# EAGLE board Schematic_v3 (EAGLE 9.6.2)
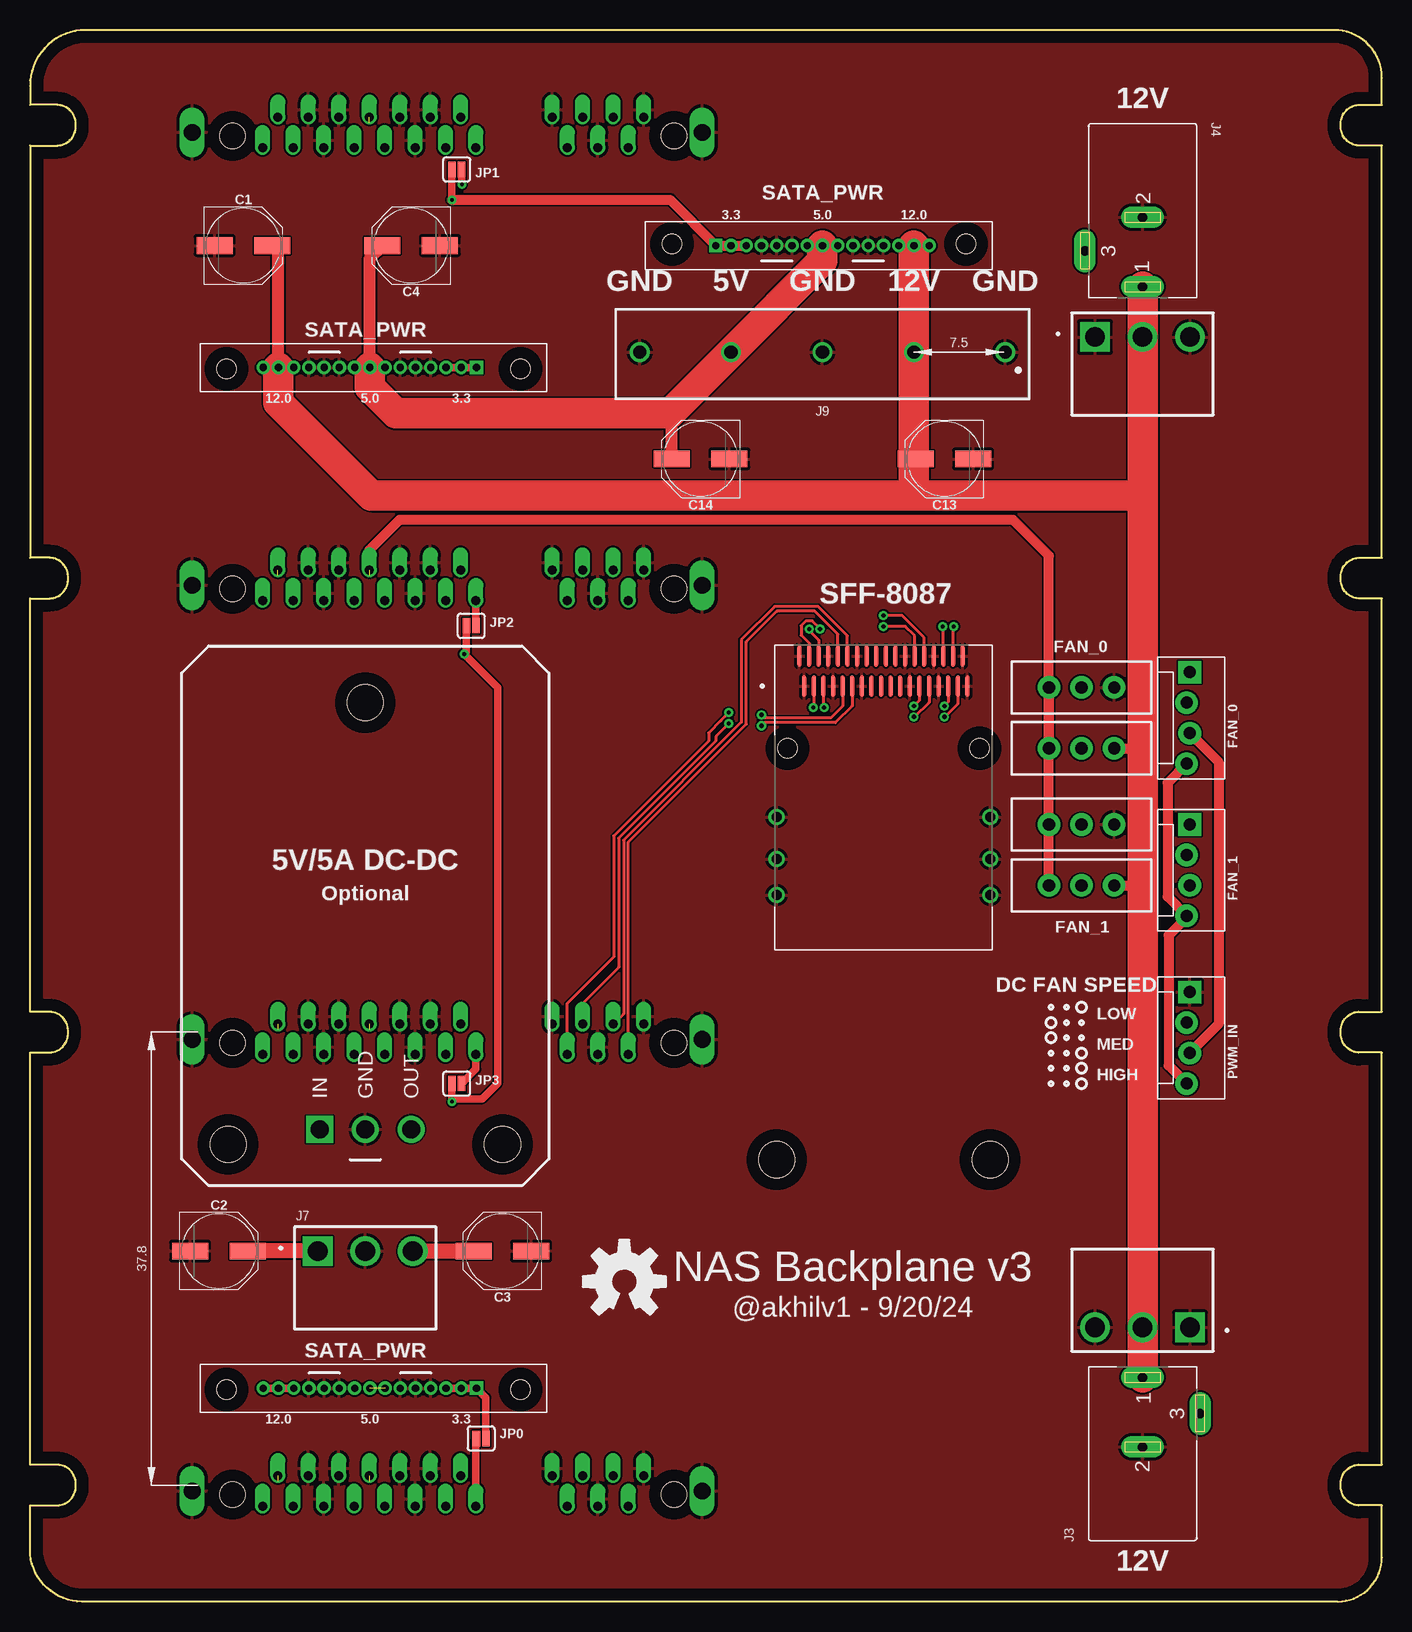
[diagram p0: board, top side]
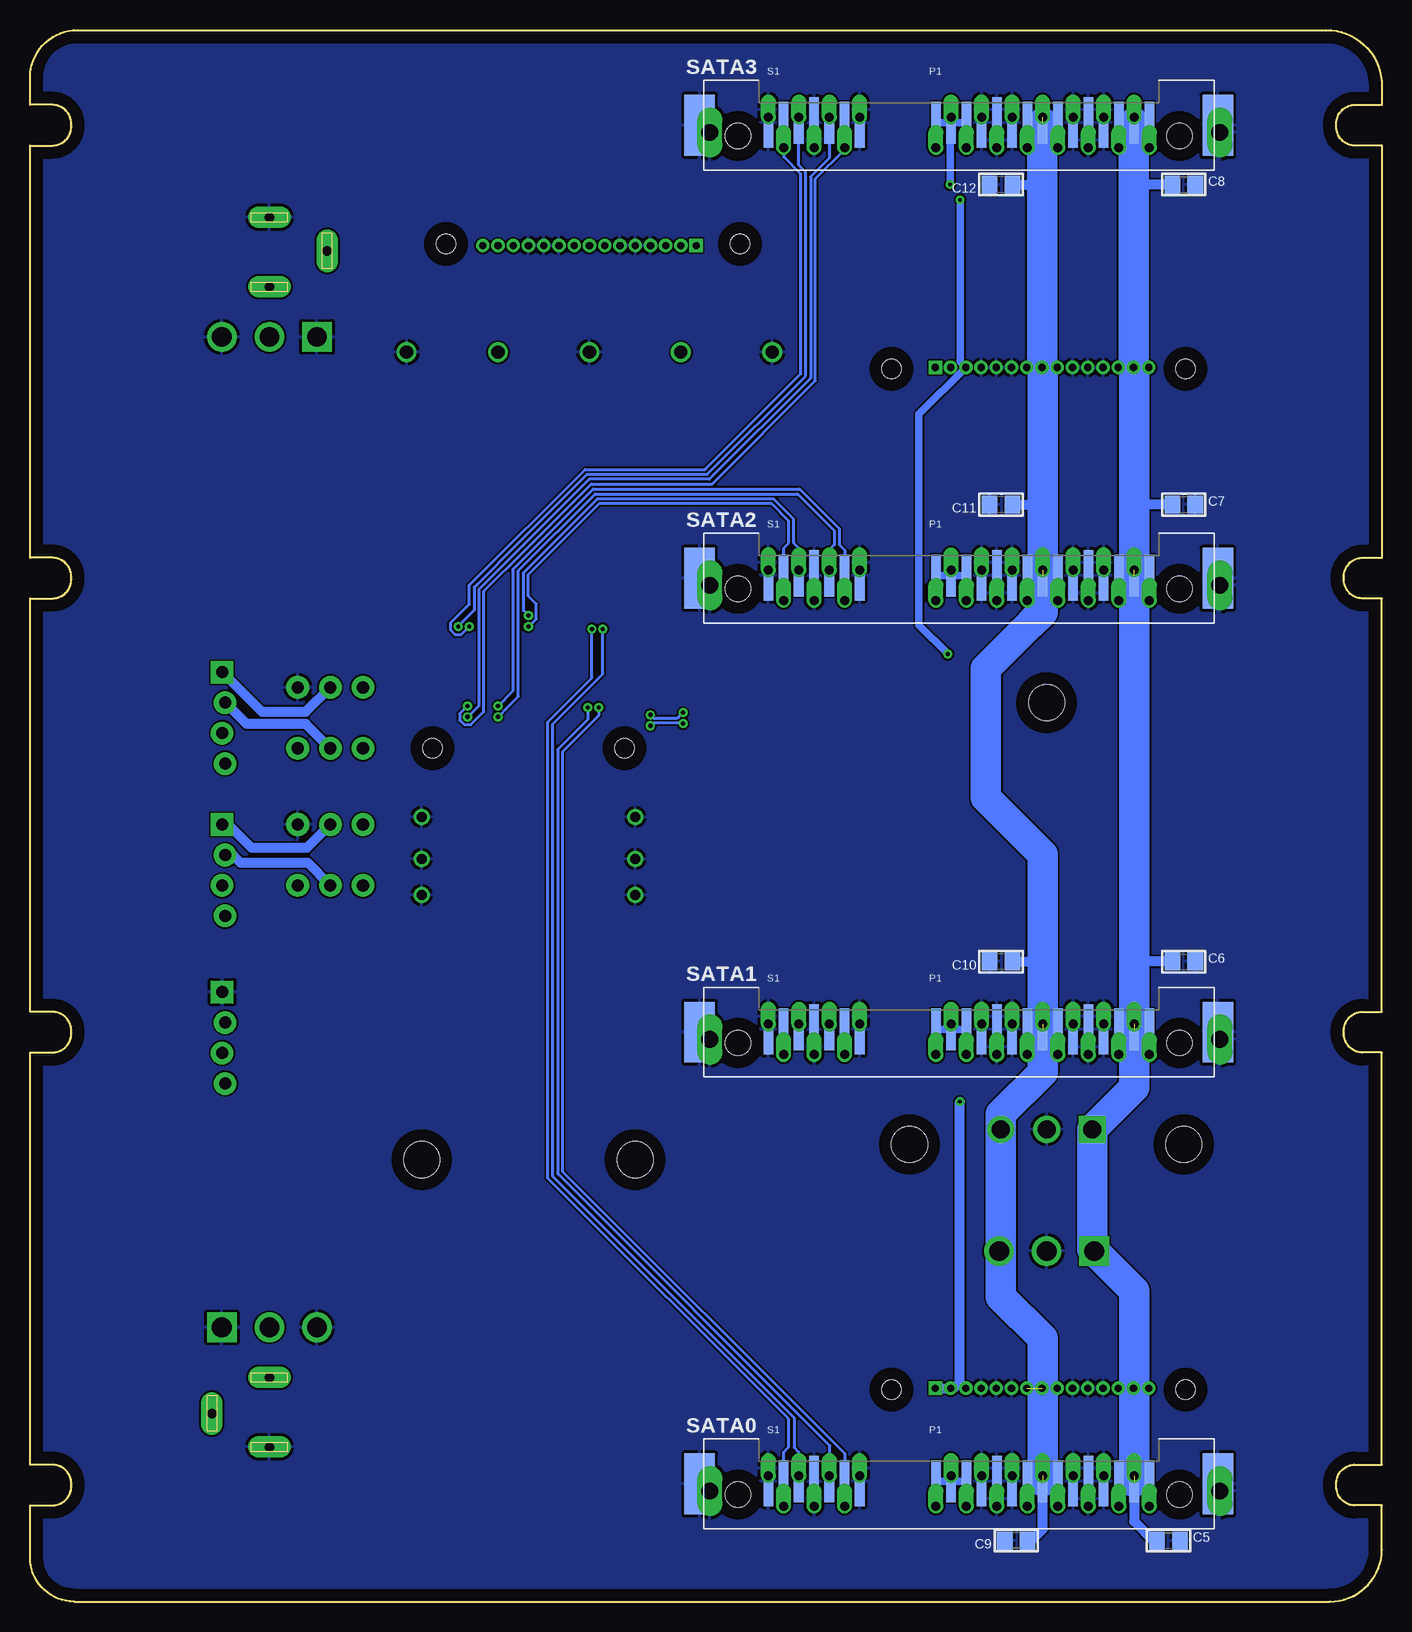
[diagram p1: board, bottom side, seen from below]

Size 112.66 x 131 mm. Coordinates in mm from the lower left corner, seen from the top.
Outline: 108.98,0 4.34,0 arc-90 0,4.34 0,8.01 2.31,8.01 arc90 3.81,9.71 arc90 2.31,11.41 0,11.41 0,45.76 1.68,45.76 arc90 3.17,47.46 arc90 1.68,49.16 0,49.16 0,83.61 1.68,83.61 arc90 3.17,85.31 arc90 1.68,87.01 0,87.01 0,121.36 2.31,121.36 arc90 3.81,123.06 arc90 2.31,124.76 0,124.76 0,126.34 arc-90 4.66,131 108.68,131 arc-90 112.66,127.02 112.66,124.76 110.72,124.76 arc90 109.22,123.06 arc90 110.72,121.36 112.66,121.36 112.66,87.01 110.72,87.01 arc90 109.22,85.31 arc90 110.72,83.61 112.66,83.61 112.66,49.16 110.72,49.16 arc90 109.22,47.46 arc90 110.72,45.76 112.66,45.76 112.66,11.41 110.72,11.41 arc90 109.22,9.71 arc90 110.72,8.01 112.66,8.01 112.66,3.68 arc-90 108.98,0
Copper layers (1*16): Top 0.035mm / dielectric 1.5mm / Bottom 0.035mm
Design rules "default *": minimum track width 6mil, minimum drill 0.3mm, track to track 6mil, track to pad 6mil, pad to pad 6mil, via to via 6mil, smd to smd 6mil, copper to edge 40mil, drill to drill 6mil, minimum pad ring 10mil, minimum via ring 8mil, stop-mask expansion 4mil, vias tented up to drill 0.35mm, thermal gap 10mil
Holes 3 mm at 62.23,36.83 80.01,36.83

## Footprints (pad centres in the part's own frame; a part is rotated, then mirrored left to right if it is on the bottom)
PANASONIC_D = smd 3 x 1.4: + 2.4,0; - -2.4,0
C0805 = smd 1.3 x 1.5: 1 -0.95,0; 2 0.95,0
MOLEX-1X4_LOCK = drill 1.016 pad 1.88 square: 1 0,0.127 | drill 1.016 pad 1.88: 2 2.54,-0.127; 3 5.08,0.127; 4 7.62,-0.127
PTH_90 = drill 0.6 pad 1.016 square: P$1 0,0 | drill 0.6 pad 1.016: P$2 1.27,0; P$3 2.54,0; P$5 5.08,0; P$7 7.62,0; P$8 8.89,0; P$9 10.16,0; P$11 12.7,0; P$13 15.24,0; P$14 16.51,0; P$15 17.78,0 | drill 0.6 pad 0.889: P$4 3.81,0; P$6 6.35,0; P$10 11.43,0; P$12 13.97,0 | hole 1.6: 20.84,0.13; -3.66,0.13
694106301002 = drill 0.8 pad 1.8 long: 1 13.6,0; 2 7.8,0; 3 10.6,-4.8
HDR-03 = drill 1.65 square: 1 -3.96,0 | drill 1.65: 2 0,0; 3 3.96,0
691243410005 = drill 1.1: 1 -15.24,0; 2 -7.62,0; 3 0,0; 4 7.62,0; 5 15.24,0
SMT-JUMPER_2_NC_PASTE_SILK = smd 0.635 x 1.27: 1 -0.406,0; 2 0.406,0
SWITCH_SPDT_PTH_11.6X4.0MM_LOCK = drill 1.016 pad 1.88: 1 0,2.718; 2 0,0; 3 0,-2.718
TE_2023246-2 = smd 0.8 x 3.5: P1 -1.905,0.23; P2 -0.635,0.23; P3 0.635,0.23; P7 5.715,0.23; P8 6.985,0.23; P9 8.255,0.23; P13 13.335,0.23; P14 14.605,0.23; P15 15.875,0.23; S2 -14.605,0.23; S3 -13.335,0.23; S5 -10.795,0.23; S6 -9.525,0.23 | smd 0.8 x 4.2: P4 1.905,0.23; P5 3.175,0.23; P6 4.445,0.23; P10 9.525,0.23; P11 10.795,0.23; P12 12.065,0.23; S1 -15.875,0.23; S4 -12.065,0.23; S7 -8.255,0.23 | smd 2.54 x 5.08: P$1 -21.59,0; P$2 21.59,0 | drill 0.75 pad 1.016 offset: THT1 -15.875,0.67; THT2 -14.605,-1.87; THT3 -13.335,0.67; THT4 -12.065,-1.87; THT5 -10.795,0.67; THT6 -9.525,-1.87; THT7 -8.255,0.67; THT8 -1.905,-1.87; THT9 -0.635,0.67; THT10 0.635,-1.87; THT11 1.905,0.67; THT12 3.175,-1.87; THT13 4.445,0.67; THT14 5.715,-1.87; THT15 6.985,0.67; THT16 8.255,-1.87; THT17 9.525,0.67; THT18 10.795,-1.87; THT19 12.065,0.67; THT20 13.335,-1.87; THT21 14.605,0.67; THT22 15.875,-1.87 | drill 1.4 pad 2 long: THT$1 -20.75,-0.6; THT$2 21.75,-0.6 | hole 2.1: 18.4,-0.9; -18.4,-0.9
TE_1888019-4 = smd 0.35 x 1.8: A1 -6.6,5.18; A2 -5.8,5.18; A3 -5,5.18; A4 -4.2,5.18; A5 -3.4,5.18; A6 -2.6,5.18; A7 -1.8,5.18; A8 -1,5.18; A9 -0.2,5.18; A10 0.6,5.18; A11 1.4,5.18; A12 2.2,5.18; A13 3,5.18; A14 3.8,5.18; A15 4.6,5.18; A16 5.4,5.18; A17 6.2,5.18; A18 7,5.18; B1 -7,7.69; B2 -6.2,7.69; B3 -5.4,7.69; B4 -4.6,7.69; B5 -3.8,7.69; B6 -3,7.69; B7 -2.2,7.69; B8 -1.4,7.69; B9 -0.6,7.69; B10 0.2,7.69; B11 1,7.69; B12 1.8,7.69; B13 2.6,7.69; B14 3.4,7.69; B15 4.2,7.69; B16 5,7.69; B17 5.8,7.69; B18 6.6,7.69 | drill 0.85: S1 -8.9,-5.72; S2 8.9,-5.72; S3 -8.9,-9.22; S4 8.9,-9.22; S5 -8.9,-12.22; S6 8.9,-12.22 | hole 1.59: -8,0; 8,0
5V_15W_DC_DC = drill 1.5 square: P$1 -3.81,-17.78 | drill 1.5: P$2 0,-17.78; P$3 3.81,-17.78 | hole 3: 0,17.78; -11.43,-19.05; 11.43,-19.05

## Placement (x,y rotation side)
C1  100uF  [PANASONIC_D]  17.78,113.03 0 top
C2  100uF  [PANASONIC_D]  15.75,29.21 0 top
C3  100uF  [PANASONIC_D]  39.37,29.21 180 top
C4  100uF  [PANASONIC_D]  31.75,113.03 180 top
C5  [C0805]  17.78,5.08 0 bottom
C6  [C0805]  16.51,53.34 0 bottom
C7  [C0805]  16.51,91.44 0 bottom
C8  [C0805]  16.51,118.11 0 bottom
C9  [C0805]  30.48,5.08 180 bottom
C10  [C0805]  31.75,53.34 180 bottom
C11  [C0805]  31.75,91.44 180 bottom
C12  [C0805]  31.75,118.11 180 bottom
C13  100uF  [PANASONIC_D]  76.2,95.25 180 top
C14  100uF  [PANASONIC_D]  55.88,95.25 180 top
FAN_0  [MOLEX-1X4_LOCK]  96.52,77.47 270 top
FAN_1  [MOLEX-1X4_LOCK]  96.52,64.77 270 top
J1  SATAPWR  [PTH_90]  37.21,102.87 180 top
J2  SATAPWR  [PTH_90]  37.21,17.78 180 top
J3  694106301002  [694106301002]  92.71,5.08 90 top
J4  694106301002  [694106301002]  92.71,123.19 270 top
J5  B3P-VH(LF)(SN)  [HDR-03]  92.71,22.86 180 top
J6  B3P-VH(LF)(SN)  [HDR-03]  92.71,105.41 0 top
J7  B3P-VH(LF)(SN)  [HDR-03]  27.94,29.21 0 top
J8  SATAPWR  [PTH_90]  57.15,113.03 0 top
J9  [691243410005]  66.04,104.14 180 top
JP0  JUMPER-SMT_2_NC_PASTE_SILK  [SMT-JUMPER_2_NC_PASTE_SILK]  37.59,13.59 180 top
JP1  JUMPER-SMT_2_NC_PASTE_SILK  [SMT-JUMPER_2_NC_PASTE_SILK]  35.56,119.38 0 top
JP2  JUMPER-SMT_2_NC_PASTE_SILK  [SMT-JUMPER_2_NC_PASTE_SILK]  36.77,81.34 0 top
JP3  JUMPER-SMT_2_NC_PASTE_SILK  [SMT-JUMPER_2_NC_PASTE_SILK]  35.56,43.18 0 top
LOGO1  OSHW-LOGOL  [OSHW-LOGO-L]  49.53,26.67 0 top
PWM_IN  [MOLEX-1X4_LOCK]  96.52,50.8 270 top
S1  [SWITCH_SPDT_PTH_11.6X4.0MM_LOCK]  87.63,71.12 270 top
S2  [SWITCH_SPDT_PTH_11.6X4.0MM_LOCK]  87.63,76.2 90 top
S3  [SWITCH_SPDT_PTH_11.6X4.0MM_LOCK]  87.63,59.69 270 top
S4  [SWITCH_SPDT_PTH_11.6X4.0MM_LOCK]  87.63,64.77 90 top
SATA0  1735284-3  [TE_2023246-2]  35.26,9.81 0 bottom
SATA1  1735284-3  [TE_2023246-2]  35.26,47.46 0 bottom
SATA2  1735284-3  [TE_2023246-2]  35.26,85.31 0 bottom
SATA3  1735284-3  [TE_2023246-2]  35.26,123.06 0 bottom
SFF-8087  1888019-4  [TE_1888019-4]  71.12,71.12 0 top
U$1  5V_DC_DC  [5V_15W_DC_DC]  27.94,57.15 0 top

## Library data of the parts
C1-C4 C13 C14 = SparkFun-Capacitors; PROD_ID: CAP-12547
C5-C12 = LU r11.5
FAN_0 FAN_1 PWM_IN = SparkFun-Connectors; PROD_ID: CONN-08186; SF_ID: PRT-08231
J1 J2 J8 = SATA_Power
J3 J4 = DC Power Jacks; CREATED_BY: PCBLayout.com; DIGIKEY_PART_NUMBER: 732-5930-ND; MANUFACTURER: Wurth Electronics Inc.; MPN: 694106301002
J5-J7 = Connectors; CREATED_BY: PCBLayout.com; DIGIKEY_PART_NUMBER: 455-1640-ND; MANUFACTURER: JST Sales America Inc.; MPN: B3P-VH(LF)(SN)
J9 = Wurth_Connectors_WR-TBL Rising Cage Clamp; IR-UL: 10A; IR-VDE: 10A; PART-NUMBER: 691243410005; PINS: 5; PITCH: 7.62mm; TYPE: Horizontal; WIRE: 12 to 30 (AWG) 3.31 to 0.0509 (mm²); WORKING-VOLTAGE-UL: 300V (AC); WORKING-VOLTAGE-VDE: 450V (AC)
JP0 JP1-JP3 = SparkFun-Jumpers
LOGO1 = SparkFun-Aesthetics
S1-S4 = SparkFun-Switches; PROD_ID: SWCH-08261; SF_SKU: COM-00102
SATA0 SATA1-SATA3 = 2023246-2; AVAILABILITY: In Stock; COMMENT: 2023246-2; DESCRIPTION: Conn SATA RCP 22 POS 1.27mm Solder RA SMD 22 Terminal 1 Port Tray; MF: TE Connectivity; MP: 2023246-2; PACKAGE: None; PRICE: None; PURCHASE-URL: https://pricing.snapeda.com/search/part/2023246-2/?ref=eda
SFF-8087 = 1888019-4; AVAILABILITY: Unavailable; COMMENT: 1888019-4; DESCRIPTION: Receptacle; Shielded; EVERCLEAR Mini-SAS; Internal; RA Combo; 36 Pos.; Dual Key; MF: TE Connectivity; MP: 1888019-4; PACKAGE: None; PRICE: None; TE_PURCHASE_URL: https://www.te.com/usa-en/product-1888019-4.html?te_bu=Cor&te_type=disp&te_campaign=seda_glo_cor-seda-global-disp-prtnr-fy19-seda-model-bom-cta_sma-317_1&elqCampaignId=32493
U$1 = SATA_Power_(v2~recovered)

## Nets
3.3V: J1.P$1 J1.P$2 J1.P$3 J2.P$1 J2.P$2 J2.P$3 J8.P$1 J8.P$2 J8.P$3 JP0.1 JP1.1 JP2.1 JP3.1
5V: C3.+ C4.+ C9.1 C10.1 C11.1 C12.1 C14.+ J1.P$7 J1.P$8 J1.P$9 J2.P$7 J2.P$8 J2.P$9 J7.3 J8.P$7 J8.P$8 J8.P$9 J9.4 S1.3 S2.1 S3.3 S4.1 SATA0.P7 SATA0.P8 SATA0.P9 SATA0.THT14 SATA0.THT15 SATA0.THT16 SATA1.P7 SATA1.P8 SATA1.P9 SATA1.THT14 SATA1.THT15 SATA1.THT16 SATA2.P7 SATA2.P8 SATA2.P9 SATA2.THT14 SATA2.THT15 SATA2.THT16 SATA3.P7 SATA3.P8 SATA3.P9 SATA3.THT14 SATA3.THT15 SATA3.THT16 U$1.P$3
12V: C1.+ C2.+ C5.1 C6.1 C7.1 C8.1 C13.+ J1.P$13 J1.P$14 J1.P$15 J2.P$13 J2.P$14 J2.P$15 J3.1 J4.1 J5.2 J6.2 J7.1 J8.P$13 J8.P$14 J8.P$15 J9.2 S1.1 S3.1 SATA0.P13 SATA0.P14 SATA0.P15 SATA0.THT20 SATA0.THT21 SATA0.THT22 SATA1.P13 SATA1.P14 SATA1.P15 SATA1.THT20 SATA1.THT21 SATA1.THT22 SATA2.P13 SATA2.P14 SATA2.P15 SATA2.THT20 SATA2.THT21 SATA2.THT22 SATA3.P13 SATA3.P14 SATA3.P15 SATA3.THT20 SATA3.THT21 SATA3.THT22 U$1.P$1
FAN0_HI: FAN_0.2 S1.2
FAN0_LO: FAN_0.1 S2.2
FAN1_HI: FAN_1.2 S3.2
FAN1_LO: FAN_1.1 S4.2
FAN_PWM: FAN_0.4 FAN_1.4 PWM_IN.4
FAN_TACH: FAN_0.3 PWM_IN.3
GND: C1.- C2.- C3.- C4.- C5.2 C6.2 C7.2 C8.2 C9.2 C10.2 C11.2 C12.2 C13.- C14.- J1.P$4 J1.P$5 J1.P$6 J1.P$10 J1.P$11 J1.P$12 J2.P$4 J2.P$5 J2.P$6 J2.P$10 J2.P$11 J2.P$12 J3.2 J4.2 J5.1 J5.3 J6.1 J6.3 J7.2 J8.P$4 J8.P$5 J8.P$6 J8.P$10 J8.P$11 J8.P$12 J9.1 J9.3 J9.5 PWM_IN.1 S2.3 S4.3 SATA0.P4 SATA0.P5 SATA0.P6 SATA0.P10 SATA0.P11 SATA0.P12 SATA0.P$1 SATA0.P$2 SATA0.S1 SATA0.S4 SATA0.S7 SATA0.THT1 SATA0.THT4 SATA0.THT7 SATA0.THT11 SATA0.THT12 SATA0.THT13 SATA0.THT17 SATA0.THT18 SATA0.THT19 SATA0.THT$1 SATA0.THT$2 SATA1.P4 SATA1.P5 SATA1.P6 SATA1.P10 SATA1.P11 SATA1.P12 SATA1.P$1 SATA1.P$2 SATA1.S1 SATA1.S4 SATA1.S7 SATA1.THT1 SATA1.THT4 SATA1.THT7 SATA1.THT11 SATA1.THT12 SATA1.THT13 SATA1.THT17 SATA1.THT18 SATA1.THT19 SATA1.THT$1 SATA1.THT$2 SATA2.P4 SATA2.P5 SATA2.P6 SATA2.P10 SATA2.P11 SATA2.P12 SATA2.P$1 SATA2.P$2 SATA2.S1 SATA2.S4 SATA2.S7 SATA2.THT1 SATA2.THT4 SATA2.THT7 SATA2.THT11 SATA2.THT12 SATA2.THT13 SATA2.THT17 SATA2.THT18 SATA2.THT19 SATA2.THT$1 SATA2.THT$2 SATA3.P4 SATA3.P5 SATA3.P6 SATA3.P10 SATA3.P11 SATA3.P12 SATA3.P$1 SATA3.P$2 SATA3.S1 SATA3.S4 SATA3.S7 SATA3.THT1 SATA3.THT4 SATA3.THT7 SATA3.THT11 SATA3.THT12 SATA3.THT13 SATA3.THT17 SATA3.THT18 SATA3.THT19 SATA3.THT$1 SATA3.THT$2 SFF-8087.A1 SFF-8087.A4 SFF-8087.A7 SFF-8087.A12 SFF-8087.A15 SFF-8087.A18 SFF-8087.B1 SFF-8087.B4 SFF-8087.B7 SFF-8087.B12 SFF-8087.B15 SFF-8087.B18 SFF-8087.S1 SFF-8087.S2 SFF-8087.S3 SFF-8087.S4 SFF-8087.S5 SFF-8087.S6 U$1.P$2
N$1: JP1.2 SATA3.P1 SATA3.P2 SATA3.P3 SATA3.THT8 SATA3.THT9 SATA3.THT10
N$2: JP2.2 SATA2.P1 SATA2.P2 SATA2.P3 SATA2.THT8 SATA2.THT9 SATA2.THT10
N$3: JP3.2 SATA1.P1 SATA1.P2 SATA1.P3 SATA1.THT8 SATA1.THT9 SATA1.THT10
N$4: JP0.2 SATA0.P1 SATA0.P2 SATA0.P3 SATA0.THT8 SATA0.THT9 SATA0.THT10
RX0_N [RX0]: SATA0.S5 SATA0.THT5 SFF-8087.A3
RX0_P [RX0]: SATA0.S6 SATA0.THT6 SFF-8087.A2
RX1_N [RX1]: SATA1.S5 SATA1.THT5 SFF-8087.A6
RX1_P [RX1]: SATA1.S6 SATA1.THT6 SFF-8087.A5
RX2_N [RX2]: SATA2.S5 SATA2.THT5 SFF-8087.A14
RX2_P [RX2]: SATA2.S6 SATA2.THT6 SFF-8087.A13
RX3_N [RX3]: SATA3.S5 SATA3.THT5 SFF-8087.A17
RX3_P [RX3]: SATA3.S6 SATA3.THT6 SFF-8087.A16
TX0_N [TX0]: SATA0.S3 SATA0.THT3 SFF-8087.B3
TX0_P [TX0]: SATA0.S2 SATA0.THT2 SFF-8087.B2
TX1_N [TX1]: SATA1.S3 SATA1.THT3 SFF-8087.B6
TX1_P [TX1]: SATA1.S2 SATA1.THT2 SFF-8087.B5
TX2_N [TX2]: SATA2.S3 SATA2.THT3 SFF-8087.B14
TX2_P [TX2]: SATA2.S2 SATA2.THT2 SFF-8087.B13
TX3_N [TX3]: SATA3.S3 SATA3.THT3 SFF-8087.B17
TX3_P [TX3]: SATA3.S2 SATA3.THT2 SFF-8087.B16

## Tracks (layer width: path | path; a pad name or v marks a point on that pad's centre or on a via)
3.3V  (via drill 0.3, 0.35)
  Top 0.61: J1.P$1 J1.P$2 J1.P$3 | JP2.1 36.36,79.16 v36.18,78.98 38.96,76.2 38.96,43.18 37.69,41.91 35.43,41.91 v35.18,41.66 35.15,41.68 JP3.1 | JP1.1 v35.15,116.84 | JP0.1 38,16.99 J2.P$1 J2.P$2 J2.P$3
  Top 0.813: J8.P$3 J8.P$2 J8.P$1 53.34,116.84 v35.15,116.84
  Bottom 0.61: v35.15,116.84 35.15,103.35 J1.P$3 38.58,98.96 38.58,81.41 36.18,79.01 v36.18,78.98
  Bottom 0.813: J2.P$3 35.18,18.29 | 35.18,18.29 v35.18,41.66 | 35.18,18.29 35.69,17.78 J2.P$2 J2.P$1
5V  (5 unrouted)
  Top 0.61: J1.P$9 J1.P$8 J1.P$7
  Top 0.813: S3.3 S4.1 S2.1 S1.3 84.91,87.17 81.92,90.17 30.8,90.17 28.27,87.65 SATA2.THT15 | J8.P$7 J8.P$8 J8.P$9
  Top 1.016: J1.P$8 28.32,112 C4.+ | C14.+ 53.48,98.92 53.34,99.06
  Top 1.27: J7.3 C3.+
  Top 2.54: J1.P$8 28.32,101.22 30.48,99.06 53.34,99.06 J9.4 66.04,111.76 J8.P$8
  Bottom 0.254: SATA0.THT16 SATA0.P9 | SATA0.THT14 SATA0.P7 | SATA2.THT16 SATA2.P9 | SATA2.THT14 SATA2.P7 | SATA3.P7 SATA3.THT14 | SATA3.P9 SATA3.THT16 | SATA1.THT14 SATA1.P7 | SATA1.THT16 SATA1.P9
  Bottom 0.61: SATA0.P9 SATA0.P8 SATA0.P7 | SATA1.P9 SATA1.P8 SATA1.P7 | SATA2.P9 SATA2.P8 SATA2.P7 | SATA3.P9 SATA3.P8 | SATA3.P7 29.5,123.24 28.32,123.24 | 28.27,17.78 J2.P$8
  Bottom 0.813: C12.1 28.32,118.11 | C11.1 28.27,91.44 27.94,91.44 | C10.1 28.27,53.34 | C9.1 29.21,5.08 28.27,6.01 SATA0.P8 | 30.62,81.42 29.35,81.42 | J2.P$9 J2.P$7
  Bottom 2.54: SATA3.P8 28.32,123.24 28.32,118.11 J1.P$8 28.27,102.82 28.27,91.44 SATA2.P8 28.27,82.49 29.35,81.42 33,77.77 33,67.01 28.27,62.29 28.27,53.34 SATA1.P8 28.27,44.12 31.75,40.64 U$1.P$3 31.75,29.36 J7.3 31.75,29.06 31.75,25.4 28.27,21.93 28.27,17.78 SATA0.P8
12V  (3 unrouted)
  Top 0.61: J1.P$15 J1.P$14 J1.P$13 | J2.P$15 J2.P$14 J2.P$13
  Top 0.813: C13.+ 73.66,95.25 | S1.1 92.71,71.12 | S3.1 92.71,59.69 | J8.P$13 J8.P$14 J8.P$15
  Top 1.016: J1.P$14 20.7,112.51 C1.+
  Top 1.27: J7.1 C2.+
  Top 2.54: 92.71,92.2 J6.2 J4.1 | 92.71,92.2 92.71,71.12 92.71,59.69 J3.1 J5.2 | J1.P$14 20.7,99.95 28.45,92.2 73.66,92.2 | 73.66,92.2 92.71,92.2 | 73.66,92.2 73.66,95.25 J9.2 J8.P$14
  Bottom 0.254: SATA0.THT22 SATA0.P15 | SATA0.THT20 SATA0.P13 | SATA2.THT22 SATA2.P15 | SATA2.THT20 SATA2.P13 | SATA3.P14 SATA3.THT21 | SATA3.P13 SATA3.THT20 | SATA3.P15 SATA3.THT22 | SATA2.P14 20.66,83.82 | SATA1.THT20 SATA1.P13 | SATA1.THT22 SATA1.P15
  Bottom 0.61: SATA0.P15 SATA0.P14 | SATA0.P13 20.75,10.04 20.7,9.99 | SATA1.P15 SATA1.P14 SATA1.P13 | SATA2.P15 SATA2.P14 SATA2.P13 | SATA3.P15 SATA3.P14 SATA3.P13 | 20.66,17.78 J2.P$14
  Bottom 0.813: C8.1 20.7,118.11 | C7.1 20.66,91.44 | C6.1 20.66,53.34 | SATA0.P14 20.66,6.68 19.05,5.08 C5.1 | J2.P$15 J2.P$13
  Bottom 2.54: 20.66,83.82 20.66,53.34 SATA1.P14 20.66,42.84 U$1.P$1 24.13,29.36 J7.1 20.66,25.89 20.66,17.78 SATA0.P14 20.7,9.99 | SATA2.P14 20.66,91.44 20.66,102.82 J1.P$14 20.7,118.11 20.7,123.24 SATA3.P14
FAN0_HI
  Bottom 0.813: S1.2 89.66,73.15 94.61,73.15 FAN_0.2
FAN0_LO
  Bottom 0.813: FAN_0.1 93.34,74.17 89.66,74.17 S2.2
FAN1_HI
  Bottom 0.813: S3.2 89.53,61.59 95.12,61.59 95.76,62.23 FAN_1.2
FAN1_LO
  Bottom 0.813: S4.2 89.59,62.81 94.18,62.81 96.14,64.77 FAN_1.1
FAN_PWM
  Top 0.813: FAN_0.4 94.79,68.25 94.79,58.75 FAN_1.4 96.39,57.02 94.89,55.52 94.89,44.68 PWM_IN.4
FAN_TACH
  Top 0.813: FAN_0.3 99.06,69.98 99.06,48.13 PWM_IN.3
GND
  Bottom 0.254: SATA0.THT18 SATA0.P11 | SATA0.THT12 SATA0.P5 | SATA2.S1 SATA2.THT1 | SATA2.S4 SATA2.THT4 | SATA2.S7 SATA2.THT7 | SATA2.P$1 56.25,84.71 SATA2.THT$1 | SATA2.P5 SATA2.THT12 | SATA2.P6 SATA2.THT13 | SATA2.P4 SATA2.THT11 | SATA2.P12 SATA2.THT19 | SATA2.P11 SATA2.THT18 | SATA2.P10 SATA2.THT17 | SATA3.THT4 SATA3.S4 | SATA3.S1 SATA3.THT1 | SATA3.S7 SATA3.THT7 | SATA0.S4 SATA0.THT4 | SATA0.S1 SATA0.THT1 | SATA0.S7 SATA0.THT7 | SATA1.S7 SATA1.THT7 | SATA1.S4 SATA1.THT4 | SATA1.S1 SATA1.THT1 | SATA1.P$1 56.38,46.99 55.88,46.99 SATA1.THT$1 | SATA0.P$1 56.25,9.21 SATA0.THT$1
  pour Bottom: -6.35,139.7 128.27,139.7 128.27,-16.51 -6.35,-16.51
  pour Top: -5.08,138.43 129.54,138.43 129.54,-17.78 -5.08,-17.78
N$1  (via drill 0.3)
  Top 0.61: v35.99,118.11 35.97,118.13 JP1.2
  Bottom 0.305: SATA3.P3 SATA3.THT10 | SATA3.P1 SATA3.THT8 | SATA3.P2 SATA3.THT9
  Bottom 0.61: SATA3.P3 SATA3.P2 | SATA3.P2 SATA3.P1 | SATA3.P2 35.99,123.2 v35.99,118.11
N$2
  Top 0.61: JP2.2 SATA2.THT8
  Bottom 0.254: SATA2.THT8 SATA2.P1 | SATA2.P2 SATA2.THT9 | SATA2.P3 SATA2.THT10
  Bottom 0.61: SATA2.P3 SATA2.P2 SATA2.P1
N$3
  Top 0.61: JP3.2 37.16,44.38 SATA1.THT8
  Bottom 0.254: SATA1.P2 SATA1.THT9 | SATA1.P1 SATA1.THT8 | SATA1.P3 SATA1.THT10
  Bottom 0.61: SATA1.P3 SATA1.P2 SATA1.P1
N$4
  Top 0.61: SATA0.THT8 37.16,13.57 JP0.2
  Bottom 0.254: SATA0.THT10 SATA0.P3 | SATA0.THT8 SATA0.P1 | SATA0.P2 SATA0.THT9
  Bottom 0.61: SATA0.P3 SATA0.P2 SATA0.P1
RX0_N  (via drill 0.35)
  Top 0.254: SFF-8087.A3 66.12,74.58 v66.17,74.52
  Bottom 0.254: v66.17,74.52 66.17,73.53 68.7,71 68.7,35.68 46.01,12.99 46.01,10.08 SATA0.S5 SATA0.THT5
RX0_P  (via drill 0.35)
  Top 0.254: SFF-8087.A2 65.32,74.58 v65.27,74.52
  Bottom 0.254: v65.27,74.52 65.27,73.86 68.29,70.83 68.29,35.85 44.78,12.34 44.78,10.16 SATA0.S6 SATA0.THT6
RX1_N  (via drill 0.35)
  Top 0.254: SFF-8087.A6 68.52,74.65 67.12,73.25 61.21,73.25 v60.96,73 | SATA1.THT5 46.05,49.87 49.05,52.86 49.05,63.65 57.15,71.74 57.15,72.1 v58.24,73.19
  Bottom 0.254: v60.96,73 60.71,73.25 58.31,73.25 v58.24,73.19
  Bottom 0.305: SATA1.S5 SATA1.THT5
RX1_P  (via drill 0.35)
  Top 0.254: SFF-8087.A5 67.72,74.65 66.73,73.66 61.21,73.66 v60.96,73.91 | SATA1.THT6 44.78,49.87 48.65,53.73 48.65,63.81 56.55,71.72 56.55,72.41 57.58,73.44 57.58,73.46 57.97,73.84 57.99,73.84 v58.24,74.09
  Bottom 0.254: v60.96,73.91 60.71,73.66 58.69,73.66 58.51,73.84 58.49,73.84 v58.24,74.09
  Bottom 0.305: SATA1.THT6 SATA1.S6
RX2_N  (via drill 0.35)
  Top 0.254: SFF-8087.A14 74.92,74.95 73.71,73.74 v73.66,73.74
  Bottom 0.254: v73.66,73.74 73.41,73.99 73.39,73.99 73,74.38 73,74.4 71.96,75.44 71.96,85.93 65.56,92.33 48.7,92.33 45.62,89.25 45.62,88.08 46.05,87.65 46.05,86.36 SATA2.THT5 SATA2.S5
RX2_P  (via drill 0.35)
  Top 0.254: SFF-8087.A13 74.12,75.11 v73.66,74.65
  Bottom 0.254: v73.66,74.65 72.39,75.92 72.39,86.07 65.73,92.73 48.53,92.73 45.22,89.42 45.22,88.09 44.78,87.66 SATA2.S6 SATA2.THT6
RX3_N  (via drill 0.35)
  Top 0.254: SFF-8087.A17 77.32,74.83 76.23,73.74 v76.2,73.74
  Bottom 0.254: v76.2,73.74 76.18,73.74 75.23,74.69 75.23,84.38 71.55,88.06 | 71.55,88.06 | SATA3.THT5 SATA3.S5 46.05,120.31 47.61,118.76 47.61,102 56.05,93.56 66.05,93.56 71.55,88.06
RX3_P  (via drill 0.35)
  Top 0.254: SFF-8087.A16 76.52,74.97 v76.2,74.65
  Bottom 0.254: v76.2,74.65 76.22,74.65 76.86,74.01 76.86,73.47 76.47,73.08 75.93,73.08 74.83,74.18 74.83,84.21 71.41,87.63 | 71.41,87.63 | SATA3.S6 SATA3.THT6 44.78,121.01 47.2,118.59 47.2,101.77 55.82,93.15 65.88,93.15 71.41,87.63
TX0_N  (via drill 0.35)
  Top 0.254: SFF-8087.B3 65.72,80.13 64.92,80.92 v64.92,81.07
  Bottom 0.254: v64.92,81.07 64.92,77.31 69.11,73.14 69.11,35.45 48.98,15.32 48.98,12.83 48.59,12.45 SATA0.THT3 SATA0.S3
TX0_P  (via drill 0.35)
  Top 0.254: SFF-8087.B2 64.92,79.9 64.27,80.56 64.27,81.35 64.65,81.73 65.2,81.73 65.83,81.09 v65.83,81.07
  Bottom 0.254: v65.83,81.07 65.83,76.98 69.51,73.3 69.51,35.28 49.48,15.26 49.48,12.83 49.87,12.45 SATA0.S2 SATA0.THT2
TX1_N
  Top 0.254: SFF-8087.B6 68.12,80.52 65.68,82.96 62.06,82.96 59.28,80.18 59.28,73.3 49.46,63.48 49.46,48.99 SATA1.THT3
  Bottom 0.305: SATA1.S3 SATA1.THT3
TX1_P
  Top 0.254: SFF-8087.B5 67.32,80.64 65.42,82.55 62.23,82.55 59.69,80.01 59.69,73.13 49.87,63.31 SATA1.THT2
  Bottom 0.305: SATA1.S2 SATA1.THT2
TX2_N  (via drill 0.35)
  Top 0.254: SFF-8087.B14 74.52,80.34 72.67,82.19 v71.12,82.19
  Bottom 0.254: v71.12,82.19 71.53,82.59 71.53,85.79 65.41,91.91 50.7,91.91 49.03,90.24 49.03,88.23 48.59,87.8 SATA2.S3 SATA2.THT3
TX2_P  (via drill 0.35)
  Top 0.254: SFF-8087.B13 73.72,80.52 72.96,81.28 v71.12,81.28
  Bottom 0.254: v71.12,81.28 71.1,81.28 70.46,81.92 70.46,83.16 71.12,83.82 71.12,85.62 65.24,91.5 50.86,91.5 49.43,90.07 49.43,88.23 49.87,87.8 SATA2.S2 SATA2.THT2
TX3_N  (via drill 0.35)
  Top 0.254: v76.97,81.28 76.92,81.23 SFF-8087.B17
  Bottom 0.254: 75.4,84.78 75.64,84.55 75.64,82.64 76.97,81.3 v76.97,81.28 | 71.96,88.23 66.22,93.97 56.21,93.97 48.02,102.17 48.02,119.16 48.59,119.74 SATA3.S3 SATA3.THT3 | 71.96,88.23 | 75.4,84.78 | 71.96,88.23 75.4,84.78
TX3_P  (via drill 0.35)
  Top 0.254: v76.07,81.28 76.12,81.23 SFF-8087.B16
  Bottom 0.254: v76.07,81.28 76.07,81.26 76.7,80.62 77.25,80.62 77.63,81.01 77.63,81.55 76.05,83.14 76.05,84.72 66.39,94.37 56.38,94.37 56.33,94.42 56.33,94.43 48.42,102.33 48.42,118.99 49.87,120.44 SATA3.THT2 SATA3.S2

## Text on the board
tPlace: 12V | SATA_PWR | GND | 5V | GND | 12V | GND | SATA_PWR | 5V/5A DC-DC | Optional | NAS Backplane v3 | @akhilv1 - 9/20/24 | SATA_PWR | 12V
tNames: FAN_0 | FAN_1 | DC FAN SPEED | LOW | MED | HIGH